# Altium PCB AIRZAI_LID_BD_REVB.PcbDoc (part 1 of 2)
Units mil, origin at the board's own origin, x right, y up, seen from the top; angles counter-clockwise.
Board outline 3392.82 x 2969.83 mil, 4 copper layers (Top, GND, PWR, Bottom), stack 30.709 mil thick; 60 components, 34 nets, 183 pads, 183 vias.
Unrouted connection lines stored in the file: 106.
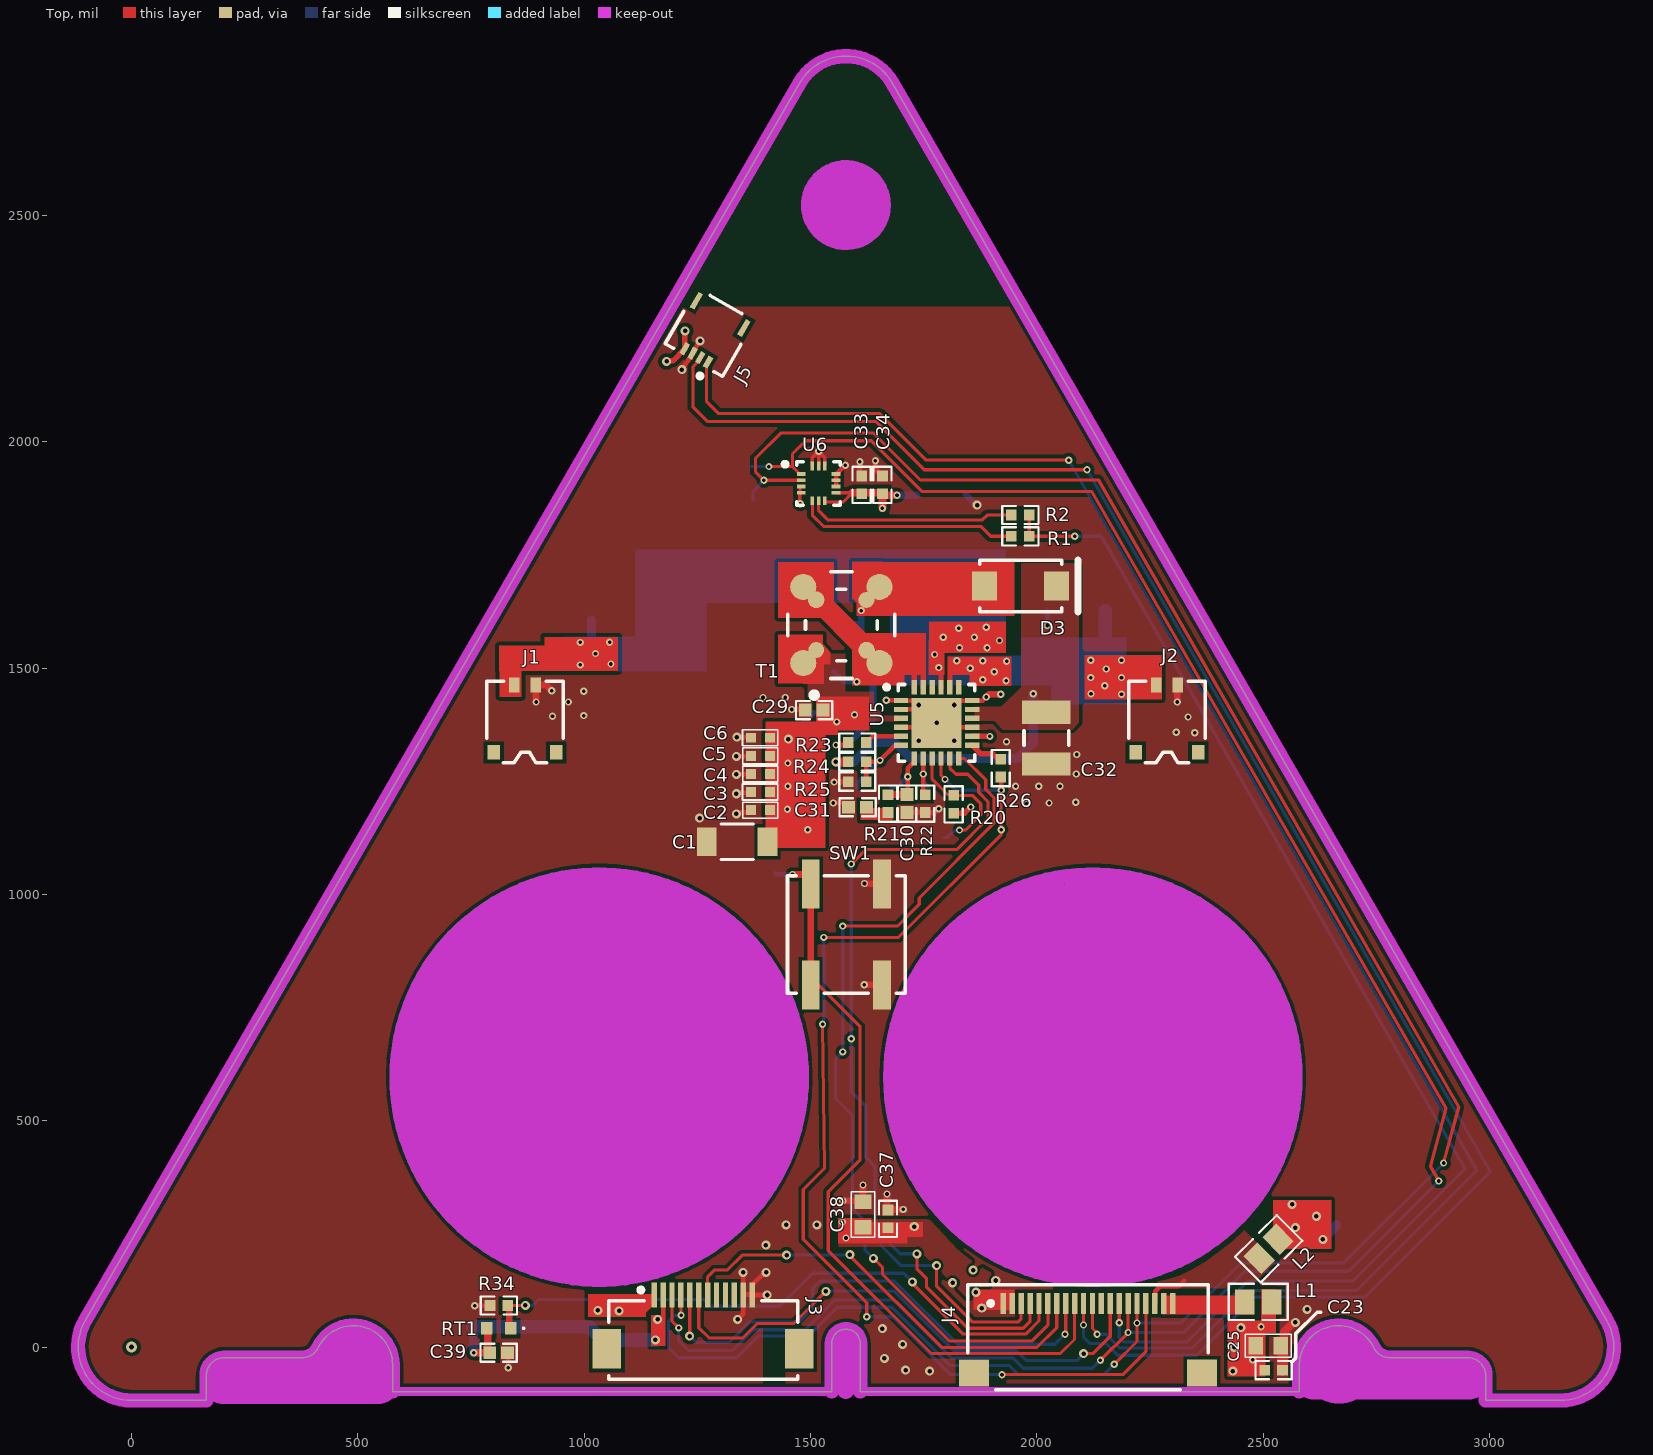
[diagram p0: Top view]
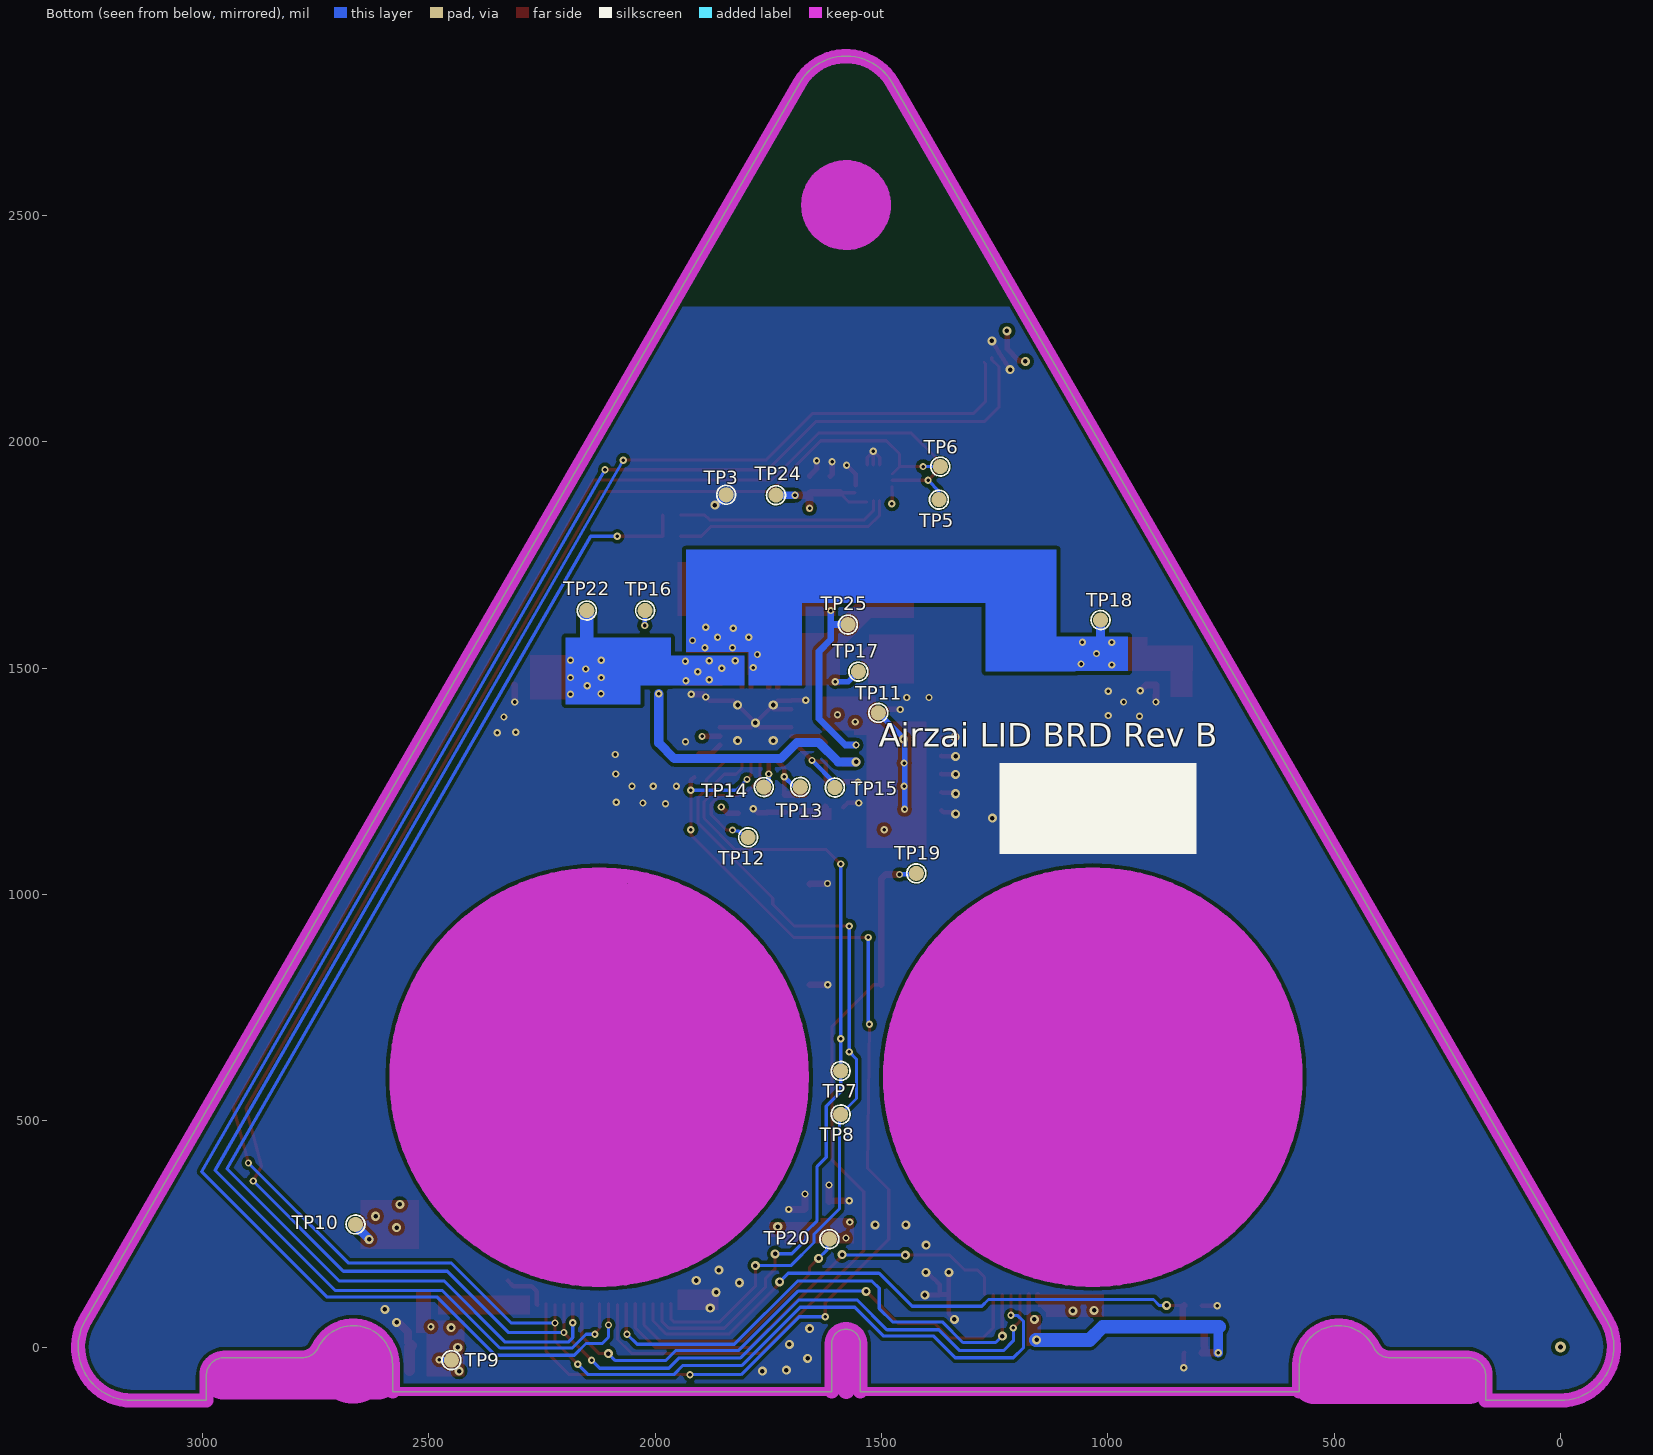
[diagram p1: Bottom view, seen from below]
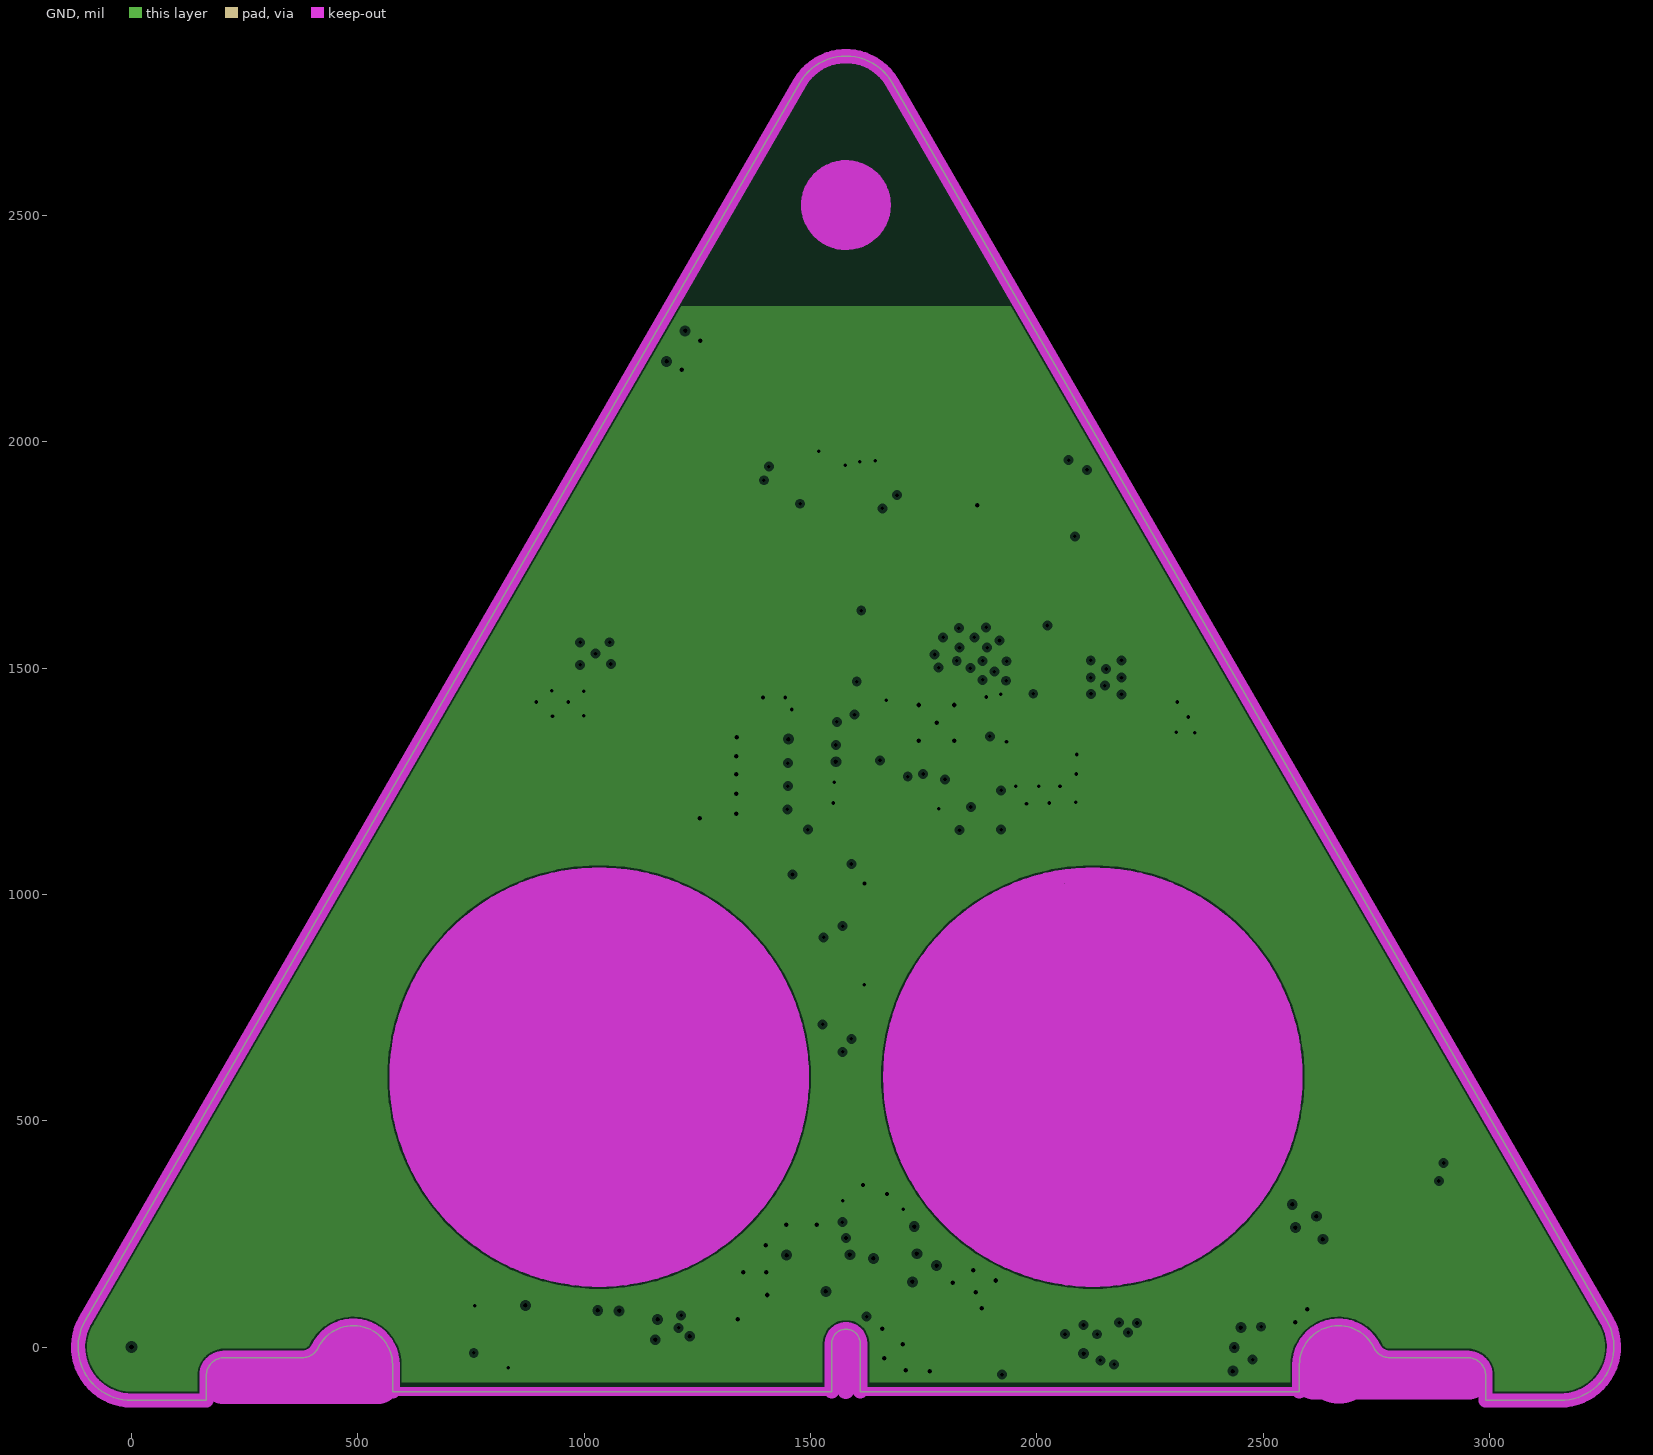
[diagram p2: GND, clearances drawn from the general rule]
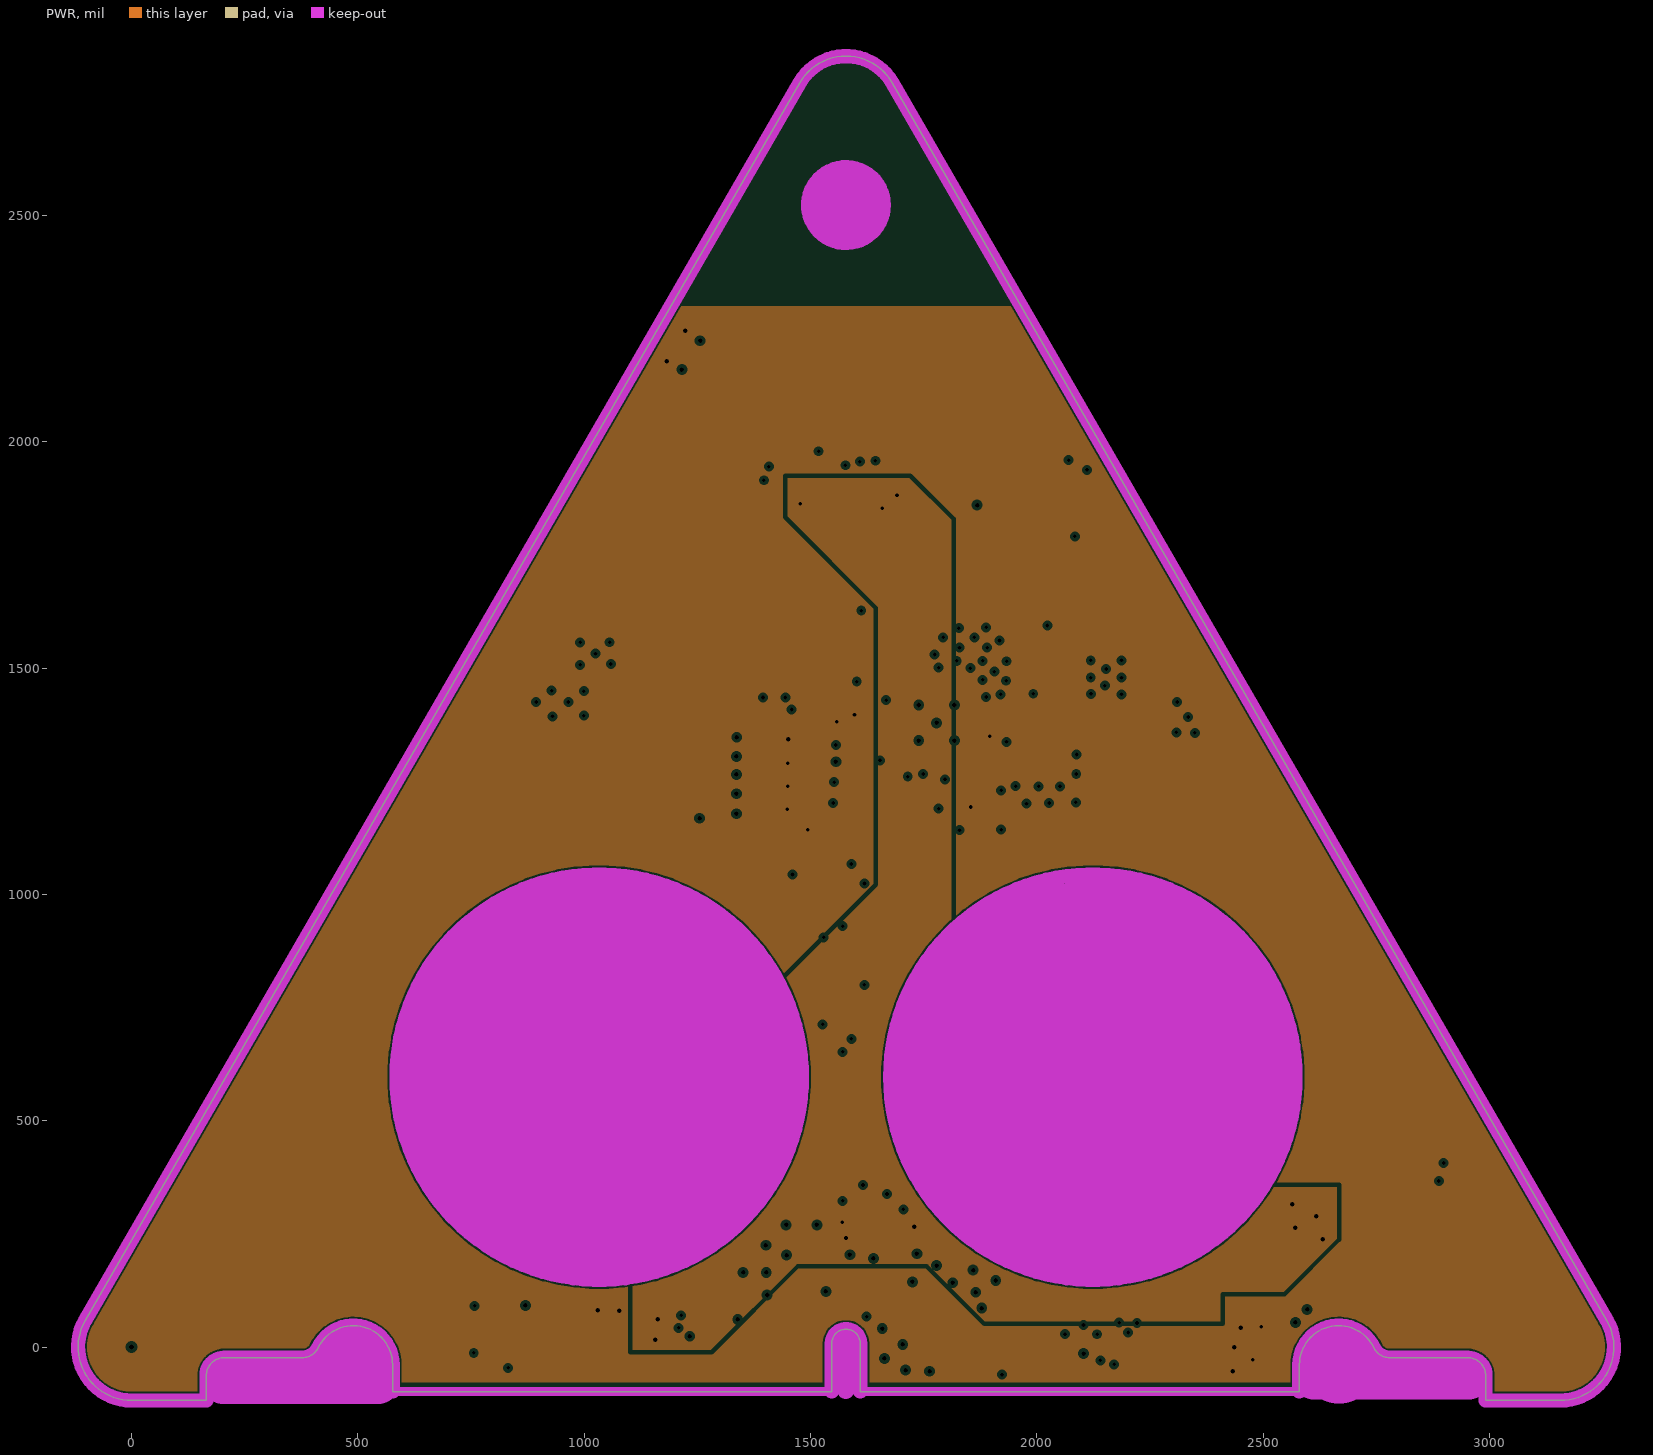
[diagram p3: PWR, clearances drawn from the general rule]
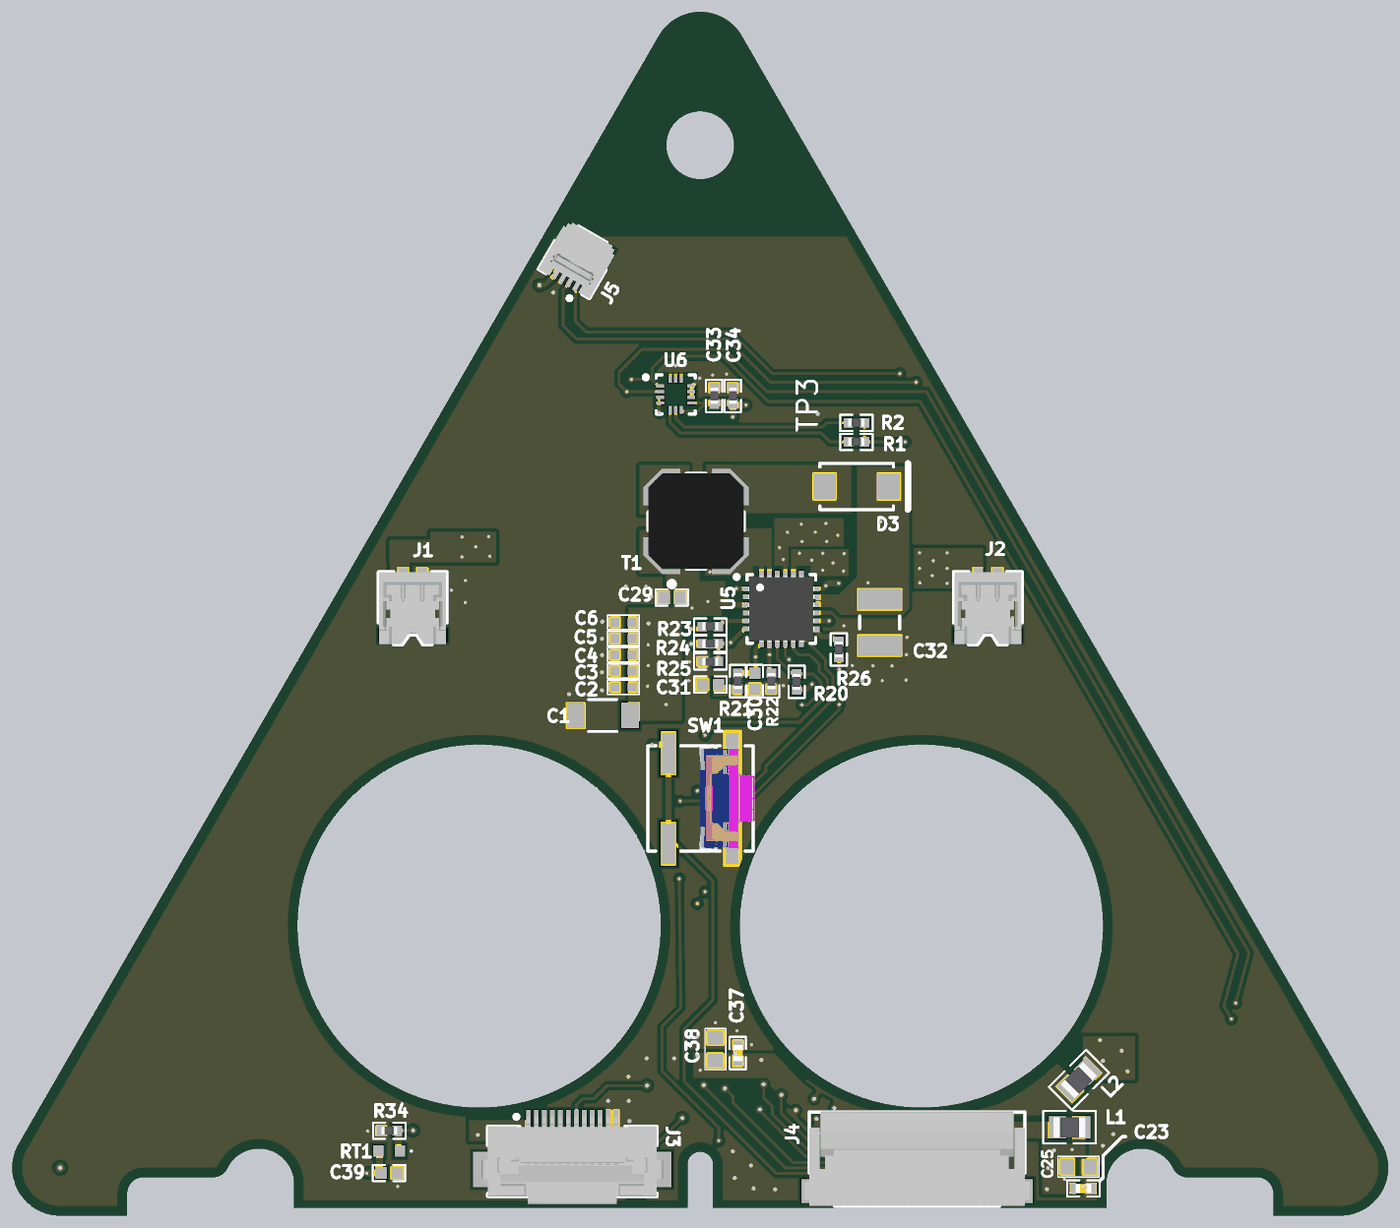
[diagram p5: 3D render of the assembled board from above, using the file's embedded part models]

## Layer stack, top to bottom
Top Solder: solder mask 0.4, Solder Resist, Dk 3.5
Top: signal copper 2.3622
Dielectric1: prepreg 5.1969, FR-4, Dk 4.8
GND: plane copper 2.3622, net GND
Dielectric 2: core 10.8661, Dk 4.2
PWR: plane copper 2.3622, net (Multiple Nets)
Dielectric3: prepreg 5.1969, FR-4, Dk 4.8
Bottom: signal copper 2.3622
Bottom Solder: solder mask 0.4, Solder Resist, Dk 3.5

## Board outline
-0.04,-118.04 165.31,-118.04 165.31,-62.92 cw(c204.68,-62.92) 204.68,-23.55 376.83,-23.55 ccw(c376.83,15.82) 412.23,-1.41 cw(c490.11,-39.3) 576.73,-39.3 576.73,-98.35 1546.8,-98.35 1546.8,7.94 cw(c1578.29,7.94) 1609.79,7.94 1609.79,-98.35 2579.86,-98.35 2579.86,-39.3 cw(c2666.47,-39.3) 2744.36,-1.41 ccw(c2779.76,15.82) 2779.76,-23.55 2951.9,-23.55 cw(c2951.9,-62.92) 2991.27,-62.92 2991.27,-118.04 3156.63,-118.04 ccw(c3156.63,0.07) 3258.91,59.13 1680.58,2792.88 ccw(c1578.29,2733.83) 1476.01,2792.88 -102.33,59.13 ccw(c-0.04,0.07)
cut-out: 1033.02,148.53 cw(c1033.02,596.36) 585.18,596.36 cw(c1033.02,596.36) 1033.02,1044.2 cw(c1033.02,596.36) 1480.85,596.36 cw(c1033.02,596.36)
cut-out: 1675.73,596.36 ccw(c2123.57,596.36) 2123.57,148.53 ccw(c2123.57,596.36) 2571.4,596.36 ccw(c2123.57,596.36) 2123.57,1044.2 ccw(c2123.57,596.36)
cut-out: 1578.29,2439.14 cw(c1578.29,2522.81) 1494.63,2522.81 cw(c1578.29,2522.81) 1578.29,2606.47 cw(c1578.29,2522.81) 1661.95,2522.81 cw(c1578.29,2522.81)

## Design rules (kind name [scope] priority, off if disabled: settings)
Clearance Clearance_gnd_polygon [(InNet('GND') AND InPolygon)] p1: gap=8 ignorepadtopadclearanceinfootprint=TRUE
Clearance [All] p2: gap=6 ignorepadtopadclearanceinfootprint=TRUE
ComponentClearance [All] p1: gap=3.94 collisioncheckmode=3 verticalgap=3.94 showdistances=FALSE
HoleSize HoleSize_1 [All] p1: absolutevalues=TRUE maxlimit=100000 minlimit=3.94 maxpercent=80.000 minpercent=20.000
HoleSize [All] p2: absolutevalues=TRUE maxlimit=100 minlimit=1 maxpercent=80.000 minpercent=20.000
HoleToHoleClearance mdViaViaSameLayer [All] p1: gap=7.87 allowstackedmicrovias=TRUE
HoleToHoleClearance [All] p2: gap=10 allowstackedmicrovias=TRUE
MinimumSolderMaskSliver [All] p1: minsoldermaskwidth=0
PasteMaskExpansion mlMinCreamFrame [All] p1: expansion=0
PasteMaskExpansion [All] p2: expansion=0
PlaneClearance [All] p1: clearance=7
PlaneConnect [All] p1: planeconnectstyle=Relief reliefexpansion=8 reliefentries=4 reliefconductorwidth=10 reliefairgap=7
PolygonConnect ThermalVias [IsVia] p1: connectstyle=Direct reliefconductorwidth=10 reliefentries=4 polygonreliefangle="90 Angle" airgapwidth=10
PolygonConnect [All] p2: connectstyle=Direct reliefconductorwidth=10 reliefentries=4 polygonreliefangle="90 Angle" airgapwidth=10
RoomDefinition "AIRZAI_LID_BD_REVB Sheet1" [InComponentClass('AIRZAI_LID_BD_REVB Sheet1')] p1: confinementstyle=ConfineIn formatcopy=TRUE lockcomponents=FALSE outline -206.69,-375 15084.93,-375 15084.93,3046.26 -206.69,3046.26
RoutingVias [All] p1: holewidth=11.81 width=23.62 viastyle="Through Hole" minholewidth=5.91 minwidth=11.81 maxholewidth=11.81 maxwidth=23.62
SilkToSilkClearance [All] p1 off: silktosilkclearance=0
SilkToSolderMaskClearance [IsPad] p1 off: minsilkscreentomaskgap=10 clearancetoexposedcopper=TRUE
SolderMaskExpansion mlMinStopFrame [All] p1: expansion=2.76
SolderMaskExpansion [All] p2: expansion=2.76
UnRoutedNet [All] p1: checkbadconnections=TRUE
Width [All] p1: maxlimit=1000 minlimit=7 preferedwidth=7
20 further rules are at their usual default settings.

## Components (designator, comment, footprint, x,y, rotation, side; value= is the part's Value field where it differs from the comment)
C1 "GRM31CR60J107ME39L" 1206_180 1338,1116 r180 top value=100uF
C2 "C1005X5R0J475M050BC" SM0402_BTD.1SM_ACT_H55_CAP_WSS 1410,1186 r180 top value=4.7uF
C3 "C1005X5R0J475M050BC" SM0402_BTD.1SM_ACT_H55_CAP_WSS 1409.99,1226 r180 top value=4.7uF
C4 "C1005X5R0J475M050BC" SM0402_BTD.1SM_ACT_H55_CAP_WSS 1410,1266 r180 top value=4.7uF
C5 "C1005X5R1A104K050BA" SM0402_BTD.1SM_ACT_H55_CAP_WSS 1410,1306 r180 top value=0.1uF
C6 "C1005X5R1A104K050BA" SM0402_BTD.1SM_ACT_H55_CAP_WSS 1409.99,1346 r180 top value=0.1uF
C23 "0.1µF" 0402CAP 2523,-51 r0 top
C25 "10µF" SM0603_BTD.1SM_H90_WSS 2483,2.66 r0 top
C29 "1uF 6.3V" CAPC0402(1005)60_M 1508,1407 r0 top value=1uF
C30 "C390pF" CAPC0402(1005)60_M 1712.74,1200.66 r270 top value=390pF
C31 "C3.9nF" CAPC0402(1005)60_M 1603.76,1192.46 r0 top value=3.9nF
C32 "2.2uF" C1210_N 2020.76,1345.46 r90 top value=2.2µF
C33 "0.1µF" 0402 1612.76,1904.46 r90 top
C34 "2.2µF" 0402 1658.76,1904.46 r270 top
C37 "0.1µF" 0402CAP 1671,283 r90 top
C38 "10µF" SM0603_BTD.1SM_H90_WSS 1615.72,264.78 r90 top
C39 "CAP 100nF 10V 0402(1005)" CAPC0402(1005)60_M 811,-12.71 r180 top value=100nF
D3 "STPS2H100A" STM-SMA-2_V 1964,1681 r0 top value="100V 2A"
J1 "=Value" CON_78171_0002 845.47,1462.6 r0 top locked
J2 "=Value" CON_78171_0002 2263.78,1462.6 r0 top
J3 "52892-1233" MOLX-52892-1233 1262.8,58.08 r0 top
J4 "XF2M-2015-1A-R100" OMRON_XF2M-2015-1A_0 2112.91,21.46 r0 top
J5 "503480-0400" MOLX-503480-0400 1274,2236 r150 top
L1 "CB2012T100KR" 0805 2489.12,100 r0 top value=10uH
L2 "CB2012T100KR" 0805 2512,217 r45 top value=10uH
R1 "DNP" 0402 1963.31,1791 r180 top
R2 "ERJ-2GE0R00X" 0402 1963.31,1838 r180 top value=0
R20 "51K1 1% 0402(1005)" 0402 1816,1199 r270 top value="51100.00 Ohm"
R21 "47K 1%" 0402 1671.25,1200.66 r270 top value="47000.00 Ohm"
R22 "12K 5%" 0402 1753.46,1200.46 r90 top value="12000.00 Ohm"
R23 "20K5" 0402 1603.1,1335.46 r180 top value="20500.00 Ohm"
R24 "560K" 0402 1603.1,1292.89 r180 top value="560000.00 Ohm"
R25 "10K" 0402 1603.1,1249.12 r0 top value="10000.00 Ohm"
R26 "0R" 0402 1920,1278.84 r270 top
R34 "10K 1% 0402(1005)" 0402 811.5,91.64 r0 top value="10000.00 Ohm"
RT1 "NCP18XH103F03RB" MURA-NCP18XH103F03RB-2_V 811,41.33 r180 top value=3455K
SW1 "SKRAALE010" SW_ALPS_SKRAALE010 1578.98,911.42 r90 top locked
T1 "NA5880-AE" COILCRAFT_NA5880-AE_MFG 1567.99,1595.11 r90 top value=3.3uH
TP3 "TESTPOINT" TP_0.9MM 1843,1882.81 r270 bottom
TP5 "TESTPOINT" TP_0.9MM 1373,1872 r270 bottom
TP6 "TESTPOINT" TP_0.9MM 1370,1945 r270 bottom
TP7 "TESTPOINT" TP_0.9MM 1590,610 r90 bottom
TP8 "TESTPOINT" TP_0.9MM 1590,514 r90 bottom
TP9 "TESTPOINT" TP_0.9MM 2450,-29 r90 bottom
TP10 "TESTPOINT" TP_0.9MM 2662,270.91 r90 bottom
TP11 "TESTPOINT" TP_0.9MM 1507,1401 r90 bottom
TP12 "TESTPOINT" TP_0.9MM 1794.51,1126 r90 bottom
TP13 "TESTPOINT" TP_0.9MM 1679.37,1237.31 r90 bottom
TP14 "TESTPOINT" TP_0.9MM 1760,1237 r90 bottom
TP15 "TESTPOINT" TP_0.9MM 1603,1236 r90 bottom
TP16 "TESTPOINT" TP_0.9MM 2022,1627 r90 bottom
TP17 "TESTPOINT" TP_0.9MM 1551,1492 r90 bottom
TP18 "TESTPOINT" TP_0.9MM 1016,1606 r90 bottom
TP19 "TESTPOINT" TP_0.9MM 1423,1046.46 r90 bottom
TP20 "TESTPOINT" TP_0.9MM 1615.14,238.42 r90 bottom
TP22 "TESTPOINT" TP_0.9MM 2151,1627 r90 bottom
TP24 "TESTPOINT" TP_0.9MM 1733,1882 r90 bottom
TP25 "TESTPOINT" TP_0.9MM 1574,1596 r90 bottom
U5 "FAN8841MPXCT-ND" WFQFN-24-FAN8841MPX 1778.34,1379.02 r0 top value=FAN8841MPX
U6 "LIS2DHTR" STM-LGA-14_L 1517.76,1908.01 r0 top

## Footprints (in the part's own frame and the unit in brackets; to place one, negate y for a bottom-side part, rotate by r counter-clockwise, add the part's x,y. Pads: shape width x height; smd on the part's side, far side on the other; paste and mask are expansions set on the pad)
0402 [mm] "Chip Resistor, Body 1.1x0.5mm, IPC High Density"
  rect 0.6x0.6 smd: 1(-0.5,0) 2(0.5,0)
  silkscreen extent -1.02,-0.51 1.02,0.51, body extent -0.5,-0.25 0.5,0.25, height 0.27
0402CAP [mm] "Chip Capacitor, Body 1.1x0.5mm, IPC High Density"
  rect 0.6x0.6 smd: 1(-0.5,0) 2(0.5,0)
  silkscreen extent -1.02,-0.51 1.02,0.51, body extent -0.5,-0.3 0.5,0.3, height 0.19
0805 [mm] "Chip Resistor, Body 2.0x1.3mm, IPC High Density"
  rect 1.1x1.4 smd: 1(-0.75,0) 2(0.75,0)
  silkscreen extent -1.65,-1.02 1.65,1.02, body extent -1.02,-0.64 0.98,0.62, height 0.47
1206_180 [mm]
  rect 1.1x1.6 smd: 1(-1.7,0) 2(1.7,0)
  silkscreen extent -0.9,-1 0.9,1, body extent -1.75,-0.95 1.75,0.95, height 1.8
C1210_N [mm] "Chip Capacitor, Body 3.2x2.5mm, IPC Medium Density"
  rect 1.3x2.7 smd: 1(-1.45,0) 2(1.45,0)
  silkscreen extent -0.4,-1.25 0.4,1.25, body extent -1.7,-1.35 1.7,1.35, height 1.5
CAPC0402(1005)60_M [mm] "Chip Capacitor, Body 1.0x0.5mm, Height 0.6mm, IPC Low Density"
  rect 0.72x0.72 smd: 1(-0.5,0) 2(0.5,0)
  silkscreen extent -1.02,-0.51 1.02,0.51, body extent -0.55,-0.3 0.55,0.3, height 0.6
COILCRAFT_NA5880-AE_MFG [mil]
  round 57.62 smd paste-39370.1 mask-39370.1: 1(-84.16,84.15) 2(-84.16,-84.16) 3(84.15,-84.16) 4(84.15,84.15)
  round 35 smd paste+0 mask+0: 1(-55.11,55.38) 3(55.11,-55.38)
  round 36.8 smd paste+0 mask+0: 2(-55.68,-55.65) 4(55.68,55.65)
  Top region: -39.37,129.92 -83.66,129.92 -129.92,83.66 -129.92,39.37 -82.68,39.37 -39.37,82.67
  Top region: 39.37,129.92 83.66,129.92 129.92,83.66 129.92,39.37 82.67,39.37 39.37,82.67
  Top region: -39.37,-129.92 -83.66,-129.92 -129.92,-83.66 -129.92,-39.37 -82.68,-39.37 -39.37,-82.68
  Top region: 39.37,-129.92 83.66,-129.92 129.92,-83.66 129.92,-39.37 82.67,-39.37 39.37,-82.68
  Top region: 24.61,86.61 51.38,86.61 86.61,55.91 86.61,24.61 59.84,24.61 24.61,55.91 24.61,86.61
  Top region: 86.61,-24.61 86.61,-51.38 51.38,-86.61 24.61,-86.61 24.61,-55.91 59.84,-24.61 86.61,-24.61
  Top region: -24.61,-86.61 -51.38,-86.61 -86.61,-55.91 -86.61,-24.61 -59.84,-24.61 -24.61,-55.91 -24.61,-86.61
  Top region: -86.61,24.61 -86.61,51.38 -51.38,86.61 -24.61,86.61 -24.61,55.91 -59.84,24.61 -86.61,24.61
  silkscreen extent -160,-118 118,118, body extent -134,-134 134,134, height 10
CON_78171_0002 [mm] "1.55 MATED HT"
  rect 0.7x0.8 smd mask+0.1: 0(-1.15,-3.775) 0(2.35,-3.775)
  rect 0.6x0.85 smd mask+0.1: 1(0,0) 2(1.2,0)
  silkscreen extent -1.55,-4.37 2.75,0.2, body extent -1.5,-4.33 2.7,0.2, height 1.44
MOLX-52892-1233 [mm] "FPC Connector, 12-Leads, Right Angle, Pitch 0.5 mm, Mated Height 2.0 mm, SMT"
  rect 0.3x1.4 smd: 1(-2.75,1.448) 2(-2.25,1.448) 3(-1.75,1.448) 4(-1.25,1.448) 5(-0.75,1.448) 6(-0.25,1.448) 7(0.25,1.448) 8(0.75,1.448) 9(1.25,1.448) 10(1.75,1.448) 11(2.25,1.448) 12(2.75,1.448)
  rect 1.6x2.2 smd: MP1(-5.4,-1.575) MP2(5.4,-1.575)
  silkscreen extent -5.3,-3.28 5.3,1.85, body extent -5.7,-3.77 5.7,1.73, height 2.05
MOLX-503480-0400 [mm] "FPC Connector, 4-Leads, Right Angle, Pitch 0.5 mm, Mated Height 1.0 mm, SMT"
  rect 0.3x0.7 smd: 1(-0.75,1.325) 2(-0.25,1.325) 3(0.25,1.325) 4(0.75,1.325)
  rect 0.3x1 smd: MP1(-1.54,-1.325) MP2(1.54,-1.325)
  silkscreen extent -1.85,-1.98 1.85,2.35, body extent -1.85,-1.97 1.85,1.63, height 1.91
MURA-NCP18XH103F03RB-2_V [mm] "Chip, 2-Leads, Body 1.6x0.8mm"
  rect 0.65x0.7 smd: 1(-0.675,0) 2(0.675,0)
  silkscreen extent -1.45,-0.05 -1.35,0.05, body extent -0.8,-0.4 0.8,0.4, height 0.8
OMRON_XF2M-2015-1A_0 [mm]
  rect 0.3x1.2 smd paste+0: 1(-4.75,1.9) 2(-4.25,1.9) 3(-3.75,1.9) 4(-3.25,1.9) 5(-2.75,1.9) 6(-2.25,1.9) 7(-1.75,1.9) 8(-1.25,1.9) 9(-0.75,1.9) 10(-0.25,1.9) 11(0.25,1.9) 12(0.75,1.9) 13(1.25,1.9) 14(1.75,1.9) 15(2.25,1.9) 16(2.75,1.9) 17(3.25,1.9) 18(3.75,1.9) 19(4.25,1.9) 20(4.75,1.9)
  rect 1.7x1.5 smd paste+0: MP1(-6.4,-2) MP2(6.4,-2)
  silkscreen extent -6.75,-2.95 6.75,2.95, body extent -7.05,-2.92 7.05,2.98, height 2
SM0402_BTD.1SM_ACT_H55_CAP_WSS [mil]
  rect 22x22 smd mask+4: 1(0,0) 2(42,0)
  silkscreen extent -18,-18 60,18, body extent -1,-10 44,10, height 26
SM0603_BTD.1SM_H90_WSS [mil]
  rect 32x38 smd mask+4: 1(0,0) 2(56,0)
  silkscreen extent -23,-26 79,26, body extent -4,-17 59,17, height 35
STM-LGA-14_L [mm] "LGA, 14-Leads, Body 2.15x2.15mm, Pitch 0.35mm, IPC High Density"
  rect 0.5x0.2 smd mask+0.07: 1(-0.974,0.525) 2(-0.974,0.175) 3(-0.974,-0.175) 4(-0.974,-0.525) 8(0.974,-0.525) 9(0.974,-0.175) 10(0.974,0.175) 11(0.974,0.525)
  rect 0.2x0.5 smd mask+0.07: 5(-0.35,-0.974) 6(0,-0.974) 7(0.35,-0.974) 12(0.35,0.974) 13(0,0.974) 14(-0.35,0.974)
  silkscreen extent -2,-1.22 1.22,1.23, body extent -1.08,-1.07 1.07,1.08, height 1
STM-SMA-2_V [mm] "Diode, 2-Leads, Body 4.6x2.9mm"
  rect 1.4x1.64 smd: 1(-2.015,0) 2(2.015,0)
  silkscreen extent -2.3,-1.45 3.21,1.45, body extent -2.3,-1.45 2.3,1.45, height 2.71
SW_ALPS_SKRAALE010 [mm] "6.2MM SQ 2.9RD ACT"
  rect 2.75x1 smd paste-0.1 mask+0.102: 1(-2.825,2) 1(2.825,2) 2(-2.825,-2) 2(2.825,-2)
  silkscreen extent -3.3,-3.3 3.3,3.3, body extent -3.4,-3.21 3.4,3.22, height 3.48
TP_0.9MM [mm] "0.9MM DIA TESTPOINT"
  round 0.85 smd paste-5 mask+0.05: 1(0,0)
  silkscreen extent -0.53,-0.53 0.53,0.53
WFQFN-24-FAN8841MPX [mm]
  rect 0.8x0.3 smd mask+0.07: 1(-2,1.25) 2(-2,0.75) 3(-2,0.25) 4(-2,-0.25) 5(-2,-0.75) 6(-2,-1.25) 13(2,-1.25) 14(2,-0.75) 15(2,-0.25) 16(2,0.25) 17(2,0.75) 18(2,1.25)
  rect 0.3x0.8 smd mask+0.07: 7(-1.25,-2) 8(-0.75,-2) 9(-0.25,-2) 10(0.25,-2) 11(0.75,-2) 12(1.25,-2) 19(1.25,2) 20(0.75,2) 21(0.25,2) 22(-0.25,2) 23(-0.75,2) 24(-1.25,2)
  rect 2.8x2.8 smd: 25(0,0)
  silkscreen extent -2.92,-2.15 2.15,2.15, body extent -2.05,-2.05 2.05,2.05, height 0.8

## Part data
C1: "CAP, CERM, 100 µF, 6.3 V, +/- 20%, X5R, 1206", Cap_Case=1206, Manufacturer=MuRata, Supplier Part Number 1=490-4539-1-ND, TempCo=X5R, Tolerance_%=20, Value1="0.003 ohm", Value2=6.3V, ValueDisplayed=100µF, AEC Category=Q200, AEC Qualified=?, Cap_F=0.0001, ComponentLink1Description="Datasheet link", ComponentLink1URL=http://search.murata.co.jp/Ceramy/PnsearchViewAction.do?HnOFG=ON&HnNFG=ON&SEL_CNT=50&sLang=en&sKey=GRM31CR60J107ME39L&x=9&y=9&search=startwith, CompType=Capacitor, ESR_ohm=0.003, LatestRevisionDate=2016-07-02, MountType=SMT, PackageReference=1206, PartNumber=GRM31CR60J107ME39L, Polarized=N, Published=2008-06-19, Publisher="Texas Instruments", RoHS=Y, SizeArea_mm2=5.12, SizeAreaWB_mm2=10.92, SizeX_mm=3.2, SizeY_mm=1.6, SizeZ_mm=1.8, Supplier 1=Digi-Key, Supplier 2=Mouser, Supplier 3=Farnell, Supplier Part Number 2=81-GRM31CR60J107ME9L, Supplier Part Number 3=1735535, SymbolVersion=2008-07-09, TaMax_C=85, TaMin_C=-55, Technology=Ceramic, U/M=EA, VDC_V=6.3
C2: "CAP, CERM, 4.7 µF, 6.3 V, +/- 20%, X5R, 0402", Manufacturer=TDK, PartNumber=C1005X5R0J475M050BC
C3 C4: "CAP, CERM, 4.7 µF, 6.3 V, +/- 20%, X5R, 0402", Cap_Case=0402, Manufacturer=TDK, Supplier Part Number 1=445-7395-1-ND, TempCo=X5R, Tolerance_%=20, Value1=Unknown, Value2=6.3V, ValueDisplayed=4.7µF, Cap_F=0.0000047, ComponentLink1Description="Datasheet link", ComponentLink1URL=http://www.tdk.com/pdf/TDKMLCCCapRange.pdf, CompType=Capacitor, LatestRevisionDate=2015-02-23, MountType=SMT, PackageReference=0402, PartNumber=C1005X5R0J475M050BC, Polarized=N, Published=2008-06-19, Publisher="Texas Instruments", RoHS=Y, Supplier 1=Digi-Key, Supplier 2=Farnell, Supplier 3=Newark, Supplier Part Number 2=1962109, Supplier Part Number 3=48T2906, SymbolVersion=2008-07-09, TaMax_C=85, TaMin_C=-55, Technology=Ceramic, U/M=EA, VDC_V=6.3
C5: "CAP, CERM, 0.1 µF, 10 V, +/- 10%, X5R, 0402", Cap_Case=0402, Manufacturer=TDK, Supplier Part Number 1=445-1265-1-ND, TempCo=X5R, Tolerance_%=10, Value1=Unknown, Value2=10V, ValueDisplayed=0.1µF, Cap_F=0.0000001, ComponentLink1Description="Datasheet link", ComponentLink1URL=http://product.tdk.com/en/catalog/datasheets/mlcc_commercial_general_en.pdf, CompType=Capacitor, LatestRevisionDate=2015-02-23, MountType=SMT, PackageReference=0402, PartNumber=C1005X5R1A104K050BA, Polarized=N, Published=2008-06-19, Publisher="Texas Instruments", RoHS=Y, Supplier 1=Digi-Key, Supplier 2=Mouser, Supplier 3=Farnell, Supplier Part Number 2=810-C1005X5R1A104K, Supplier Part Number 3=2368215, SymbolVersion=2008-07-09, TaMax_C=85, TaMin_C=-55, Technology=Ceramic, U/M=EA, VDC_V=10
C6: "CAP, CERM, 0.1 µF, 10 V, +/- 10%, X5R, 0402", Cap_Case=SM0402_BTD.1SM_ACT, Manufacturer=TDK, Supplier Part Number 1=445-1265-1-ND, TempCo=X5R, Tolerance_%=10, Value1=Unknown, Value2=10V, ValueDisplayed=0.1µF, Cap_F=0.0000001, ComponentLink1Description="Datasheet link", ComponentLink1URL=http://product.tdk.com/en/catalog/datasheets/mlcc_commercial_general_en.pdf, CompType=Capacitor, LatestRevisionDate=2015-02-23, MountType=SMT, PackageReference=0402, PartNumber=C1005X5R1A104K050BA, Polarized=N, Published=2008-06-19, Publisher="Texas Instruments", RoHS=Y, Supplier 1=Digi-Key, Supplier 2=Mouser, Supplier 3=Farnell, Supplier Part Number 2=810-C1005X5R1A104K, Supplier Part Number 3=2368215, SymbolVersion=2008-07-09, TaMax_C=85, TaMin_C=-55, Technology=Ceramic, U/M=EA, VDC_V=10
C23 C33 C37: library part C0402-100n, "Capacitor, X7R, ±10%", Case-EIA=0402, Case-Metric=1005, Manufacturer=TDK, Manufacturer Part Number=C1005X7R1C104K, Rated Voltage="16 V", Supplier Part Number 1=445-4952-2-ND, Tolerance=±10%, Note="16V ±10% X7R", Pin Count=2, Supplier 1=Digi-Key, Technology=SMT
  C23: Max Thickness=0.6mm
  C33 C37: Max Thickness="0.6 mm"
C25: library part C0402-100n, "6.3volts X5R 20%", Case-EIA=0603, Case-Metric=1608, Manufacturer=MURATA, Manufacturer Part Number=GRM188R60J106ME47D, Rated Voltage="6.3 V", Supplier Part Number 1=490-3896-6-ND, Tolerance=±10%, Max Thickness="0.9 mm", Note="6.3volts X5R 20%", Supplier 1=Digi-Key, Technology=SMT
C29: library part CAP, "CAP 1uF 6.3V ±10% 0402 (1005 Metric) Thickness 0.6mm SMD", Case-EIA=0402, Case-Metric=1005, Manufacturer=MURATA, Manufacturer Part Number=GRM155R61A105KE15D, Rated Voltage="10 V", Supplier Part Number 1=490-3890-6-ND, Tolerance=±10%, Max Thickness="0.6 mm", Supplier 1=Digi-Key, Technology=SMT
C30: library part CAP, "CAP 390pF 50V ±20% 0402 (1005 Metric) Thickness 0.6mm SMD", Case-EIA=0402, Case-Metric=1005, Manufacturer=KEMET, Manufacturer Part Number=C0402C391K5RACTU, Rated Voltage="50 V", Supplier Part Number 1=399-7792-6-ND, Tolerance=±20%, Max Thickness="0.6 mm", Supplier 1=Digi-Key, Technology=SMT
C31: library part CAP, "CAP 3.9nF 50V ±10% 0402 (1005 Metric) Thickness 0.6mm SMD", Case-EIA=0402, Case-Metric=1005, Manufacturer=TDK, Manufacturer Part Number=C2012C0G1H392J060AA, Rated Voltage="50 V", Supplier Part Number 1=445-7510-1-ND, Tolerance=±10%, Max Thickness="0.6 mm", Supplier 1=Digi-Key, Technology=SMT
C32: library part C3225JB2A225K230, "Imported", Case-EIA=1210, Case-Metric=3225, Manufacturer=TDK, Manufacturer_Part_Number=C3225JB2A225K230AB, Rated Voltage="100 V", Supplier Part Number 1=445-11868-2-ND, Tolerance=±10%, Built_By=EMA_UL_Team, C="Copyright (C) 2015 Accelerated Designs. All rights reserved", Manufacturer Part Number=C3225JB2A225K230AB, RefDes=RefDes, Supplier 1=Digi-Key, Technology=SMT, Type=DEV, Vendor=TDK
C34: library part "C0603-1µ0 X7R", "Capacitor, X7R, ±10%", Case-EIA=0402, Case-Metric=1005, Manufacturer=TDK, Manufacturer Part Number=C1005X5R0J225M, Rated Voltage="6.3 V", Supplier Part Number 1=445-4999-2-ND, Tolerance=±10%, Max Thickness="0.6 mm", Note="6.3V ±20% X5R", Supplier 1=Digi-Key, Technology=SMT
C38: library part C0402-100n, "Capacitor, X7R, ±10%", Case-EIA=0603, Case-Metric=1608, Manufacturer=MURATA, Manufacturer Part Number=GRM188R60J106ME47D, Rated Voltage="6.3 V", Supplier Part Number 1=490-3896-6-ND, Tolerance=±10%, Max Thickness="0.9 mm", Note="6.3volts X5R 20%", Supplier 1=Digi-Key, Technology=SMT
C39: library part CAP, "CAP 100nF 10V ±10% 0402 (1005 Metric) Thickness 0.6mm SMD", Case-EIA=0402, Case-Metric=1005, Manufacturer=Yageo, Manufacturer Part Number=CC0402ZRY5V8BB104, Rated Voltage="25 V", Supplier Part Number 1=311-1375-6-ND, Tolerance=±10%, Max Thickness="0.6 mm", Supplier 1=Digi-Key, Technology=SMT
D3: library part DSKY-AK-2, "Power Schottky Rectifier, 2 A, 100 V, 2-Pin SMD (SMA), RoHS, Tape and Reel", Capacitance @ Vr, F=-, Case-EIA="DO-214AC, SMA", Current - Average Rectified (Io)=2A, Current - Reverse Leakage @ Vr=1µA@100V, Manufacturer=STMicroelectronics, Operating Temperature - Junction=175°C(Max), Package / Case=DO-214AC,SMA, Package Description="2-Pin Surface Mount Device, Body 4.275 x 2.575 mm", Package Reference=SMA, Rated Voltage="100 V", Standard Package=1, Supplier Device Package=SMA(DO-214AC), Supplier Part Number 1=497-3758-6-ND, Voltage - DC Reverse (Vr) (Max)=100V, Voltage - Forward (Vf) (Max) @ If=790mV@2A, Category=DiscreteSemiconductorProducts, Datasheet URL=http://www.st.com/content/ccc/resource/technical/document/datasheet/0a/8b/df/ef/15/72/4f/38/CD00001548.pdf/files/CD00001548.pdf/jcr:content/translations/en.CD00001548.pdf, Datasheet Version=06/2013, Diode Type=Schottky, Family=Diodes,Rectifiers-Single, Manufacturer Part Number=STPS2H100A, Manufacturer URL=http://www.st.com/, Mounting Technology=SurfaceMount, Mounting Type=SurfaceMount, Online Catalog=SchottkyDiode, Other Names=497-3758-6, Other Related Documents=STPS2H100ViewAllSpecifications, Package URL=http://www.st.com/st-web-ui/static/active/en/resource/technical/document/datasheet/CD00283518.pdf, Packaging=Digi-Reel®, Reverse Recovery Time (trr)=-, Series=-, Speed=FastRecovery=200mA(Io), Supplier 1=Digi-Key, Technology=SMT
J1 J2: library part CONN_BM02B_SURS_TF, Manufacturer=MOLEX, Manufacturer Part Number=781710002, Supplier Part Number 1=WM4459TR-ND, Supplier 1=Digi-Key, Technology=SMT
J3: library part MOLX-52892-1233, "0.5 mm Pitch Easy-On(TM) Type FPC Connector, 2.0 mm Mated Height, Right Angle, ZIF, SMT, Bottom Contact, 12 Circuits, -40 to 85 degC, ELV and RoHS Compliant, Tape and Reel", Current (Max per Contact)=0.5A, Manufacturer=MOLEX, Manufacturer Part Number=0528921233, Supplier Part Number 1=WM11084TR-ND, Voltage (Max)=50V, Circuits (Loaded)=12, ComponentLink1Description="Manufacturer URL", ComponentLink1URL=http://www.molex.com/molex/index.jsp, ComponentLink2Description=Datasheet, ComponentLink2URL=http://www.molex.com/webdocs/datasheets/pdf/en-us/0528921233_FFC_FPC_CONNECTORS.pdf, ComponentLink3Description="Package Specification", ComponentLink3URL=http://www.molex.com/pdm_docs/sd/528921233_sd.pdf, Contact Position=Bottom, Durability (mating cycles max)=20, Entry Angle="90degrees Angle", Mated Height=2.00mm, Material - Metal="Phosphor Bronze", Material - Plating Mating="Silver, Tin-Bismuth", Material - Plating Termination="Silver, Tin-Bismuth", Max Thickness="0.6 mm", Mounting Technology="Surface Mount", Number of Rows=1, Orientation="Right Angle", PackageDescription="12-Lead FPC Connector, Pitch 0.5 mm", PackageReference=52892-1233, PackageVersion="Rev. A, 05/2013", Packing="Tape and Reel", PartNumber=52892-1233, PCB Locator=No, PCB Retention=Yes, Pitch - Mating Interface=0.50mm, Pitch - Termination Interface=0.50mm, Polarized to PCB=No, RoHS=TRUE, Stackable=No, Supplier 1=Digi-Key, Technology=SMT
J4: Manufacturer="OMRON ELECTRONIC COMPONENTS", Supplier Part Number 1=Z5253-ND, ComponentLink1Description="Manufacturer URL", ComponentLink1URL=http://www.molex.com/molex/index.jsp, ComponentLink2URL=http://www.molex.com/webdocs/datasheets/pdf/en-us/0528922033_FFC_FPC_CONNECTORS.pdf, ComponentLink3Description="Package Specification", ComponentLink3URL=http://www.molex.com/pdm_docs/sd/528922033_sd.pdf, Manufacturer Part Number=XF2M-2015-1A-R100, Stock 1=0, Supplier 1=Digikey
J5: "0.5 mm Pitch Easy-On(TM) BackFlip(TM) Type FPC Connector, 1.0 mm Mated Height, Right Angle, SMT, Dual Contact, 4 Circuits, -40 to 85 degC, ELV and RoHS Compliant, Tape and Reel", Current (Max per Contact)=0.5A, Manufacturer=Molex, Voltage (Max)="50V AC (RMS)/DC", Circuits (Loaded)=4, ComponentLink1Description="Manufacturer URL", ComponentLink1URL=http://www.molex.com/molex/index.jsp, ComponentLink2Description=Datasheet, ComponentLink2URL=http://www.molex.com/webdocs/datasheets/pdf/en-us/5034800400_FFC_FPC_CONNECTORS.pdf, ComponentLink3Description="Package Specification", ComponentLink3URL=http://www.molex.com/pdm_docs/sd/5034800400_sd.pdf, Contact Position=Dual, Durability (mating cycles max)=10, Entry Angle="90degrees Angle", Mated Height=1.00mm, Material - Metal="Phosphor Bronze", Material - Plating Mating=Gold, Material - Plating Termination="Gold, Tin", Mounting Technology="Surface Mount", Number of Rows=1, Orientation="Right Angle", PackageDescription="4-Lead FPC Connector, Pitch 0.5 mm", PackageReference=503480-0400, PackageVersion="Rev. F, 09/2012", Packing="Tape and Reel", PartNumber=503480-0400, PCB Locator=No, PCB Retention=Yes, Pitch - Mating Interface=0.50mm, Polarized to PCB=Yes, RoHS=TRUE, Stackable=No
L1 L2: "Inductor, 10 µH, 0.5A, 0.65 ohm, SMD", Case/Package=0805, Case Code (Metric)=2012, Current Rating=520mA, DC Resistance (DCR)=500mR, Inductance=10uH, Inductance Tolerance=10%, Manufacturer="Taiyo Yuden", Max DC Current=200mA, Max Operating Temperature=105°C, Min Operating Temperature=-40°C, Package Quantity=3000, Self Resonant Frequency=32MHz, Supplier Part Number 1=587-2452-1-ND, Test Frequency=2.52MHz, Value1="0.65 ohm", Value2=0.5A, ValueDisplayed=10µH, Case Code (Imperial)=0805, ComponentLink1Description="Datasheet link", ComponentLink1URL=http://www.yuden.co.jp/ut/product/category/inductor/BRC2012T2R2MD.pdf, ComponentLink2Description=https://datasheet.ciiva.com/1040/cb2012t100kr-ss-1040384.pdf?src-supplier=Digi-Key, ComponentLink2URL=https://datasheet.ciiva.com/1040/cb2012t100kr-ss-1040384.pdf?src-supplier=Digi-Key, Composition=Wirewound, Core Material=Ferrite, Halogen Free="Halogen Free", Height=1.25mm, Height - Seated (Max)=0.057inch, Lead Free="Lead Free", Length=0.079inch, Manufacturer Part Number=CB2012T100KR, Mount="Surface Mount", Number of Pins=2, Packaging="Tape and Reel", PartNumber=CB2012T100KR, Pricing 1="1 = 0.23000, 10 = 0.20700, 100 = 0.14230, 500 = 0.12162, 1000 = 0.09315 (USD)", REACH SVHC=Unknown, RoHS=Yes, Saturation Current=200mA, Shielding=Unshielded, Stock 1=18059, Supplier 1=Digi-Key, Technology=Wirewound, Termination=SMD/SMT, Tolerance=10%, Width=0.049inch
R1: library part ERJ-2GE0R00X, "RES, DNP, 0402", ComponentLink1Description="Datasheet link", ComponentLink1URL=http://www.panasonic.com/industrial/components/pdf/AOA0000CE1.pdf
R2: "RES, 0, 5%, 0.063 W, 0402", Manufacturer=Panasonic, Power_W=0.063, Supplier Part Number 1=P0.0JCT-ND, TempCo="600 ppm/C", Tolerance_%=5, Value1=5%, Value2=0.063W, Value_Code=0000, ValueDisplayed=0, AEC Category=Q200, AEC Qualified=?, ComponentLink1Description="Datasheet link", ComponentLink1URL=http://www.panasonic.com/industrial/components/pdf/AOA0000CE1.pdf, CompType=Resistor, EIA_Code=E24, LatestRevisionDate=2016-07-01, MountType=SMT, PackageReference=0402, PartNumber=ERJ-2GE0R00X, Published=2008-06-26, Publisher="Texas Instruments", Res_ohm=0, RoHS=Y, SizeArea_mm2=0.5, SizeX_mm=1, SizeY_mm=0.5, SizeZ_mm=0.6, Supplier 1=Digi-Key, Supplier 2=Mouser, Supplier 3=Farnell, Supplier Part Number 2=667-ERJ-2GE0R00X, Supplier Part Number 3=2059190, SymbolVersion=2009-05-29, Technology="Thick Film", U/M=EA, VDC_V=50
R20: library part RES, "51K1 0.063W 1% 0402 (1005 Metric)  SMD", Case-EIA=0402, Case-Metric=1005, Manufacturer="Vishay Dale", Manufacturer Part Number=CRCW040251K1FKED, Power="0.063 W", Supplier Part Number 1=541-51.1KLDKR-ND, Tolerance="1 %", Max Thickness="0.6 mm", Supplier 1=Digi-Key, Technology=SMT
R21: library part RES, "47K 0.063W 1% 0402 (1005 Metric)  SMD", Case-EIA=0402, Case-Metric=1005, Manufacturer=panasonic, Manufacturer Part Number=ERJ-2RKF4702X, Power="0.063 W", Supplier Part Number 1=P47.0KLTR-ND, Tolerance="1 %", Max Thickness="0.6 mm", Supplier 1=Digi-Key, Technology=SMT
R22: library part RES, "12K 0.063W 5% 0402 (1005 Metric)  SMD", Case-EIA=0402, Case-Metric=1005, Manufacturer=Yageo, Manufacturer Part Number=RC0402JR-0712KL, Power="0.063 W", Supplier Part Number 1=311-12KJRTR-ND, Tolerance="5 %", Max Thickness="0.6 mm", Supplier 1=Digi-Key, Technology=SMT
R23: library part RES, "20K5 0.063W 1% 0402 (1005 Metric)  SMD", Case-EIA=0402, Case-Metric=1005, Manufacturer="Vishay Dale", Manufacturer Part Number=CRCW040220K5FKED, Power="0.063 W", Supplier Part Number 1=541-20.5KLDKR-ND, Tolerance="1 %", Max Thickness="0.6 mm", Supplier 1=Digi-Key, Technology=SMT
R24: library part RES, "560K 0.063W 1% 0402 (1005 Metric)  SMD", Case-EIA=0402, Case-Metric=1005, Manufacturer="Vishay Dale", Manufacturer Part Number=CRCW0402560KFKED, Power="0.063 W", Supplier Part Number 1=541-560KLDKR-ND, Tolerance="1 %", Max Thickness="0.6 mm", Supplier 1=Digi-Key, Technology=SMT
R25: library part RES, "10K 0.063W 5% 0402 (1005 Metric)  SMD", Case-EIA=0402, Case-Metric=1005, Manufacturer="Vishay Dale", Manufacturer Part Number=CRCW040210K0JNED, Power="0.063 W", Supplier Part Number 1=541-10KJCT-ND, Tolerance="5 %", Max Thickness="0.6 mm", Supplier 1=Digi-Key, Technology=SMT
R26: library part R0402-12k, "Resistor, ±1%, 0.063W", Case-EIA=0402, Case-Metric=1005, Manufacturer=Panasonic, Manufacturer Part Number=ERJ-2GE0R00X, Supplier Part Number 1=P0.0JTR-ND, Tolerance="5 %", Max Thickness="0.6 mm", Note="0.1W JUMPER", Pin Count=2, Supplier 1=Digi-Key, Technology=SMT
R34: library part RES, "10K 0.063W 1% 0402 (1005 Metric)  SMD", Case-EIA=0402, Case-Metric=1005, Manufacturer=Susumu, Manufacturer Part Number=RR0510P-103-D, Power="0.063 W", Supplier Part Number 1=RR05P10.0KDTR-ND, Tolerance="1 %", Max Thickness="0.6 mm", Supplier 1=Digi-Key, Technology=SMT
RT1: library part MURA-NCP18XH103F03RB-2, "NTC Thermistor, 10 KOhm, +/- 1%, 0.1 W, -40 to 125 degC, 0603 (1608 Metric), RoHS, Tape and Reel", Case-EIA=0603, Case-Metric=1608, Manufacturer=Murata, Rated Current=310A, Resistance=10kO, Supplier Part Number 1=490-4800-2-ND, Temperature Range=-40to+125degC, Tolerance="1 %", Tolerance (%)=±1%, B-constant=3434K, Datasheet URL=http://www.jameco.com/Jameco/Products/ProdDS/1870999.pdf, Datasheet Version=Apr-05, Manufacturer Part Number=NCP18XH103F03RB, Manufacturer URL=http://www.murata.com/, Max Thickness="0.6 mm", Supplier 1=Digi-Key, Technology=SMT, Type=NTC
SW1: library part SW_SKRAALE010, Manufacturer=ALPS, Manufacturer Part Number=SKRAAKE010
T1: library part TRANS-DOT-1-1-4, "Power Inductor and Transformer, 9.6 / 38.42 uH, +/- 20%, 3.4 / 1.7 A, -40 to 85 degC, 4-Pin SMD, RoHS, Tape and Reel", Case-EIA=3.9mmx3.9mm, Inductance - Parallel=3.3uH, Manufacturer=CoilCraft, Maximum DC Current=1.3A, Maximum DC Resistance=19mOhms, Operating Temperature Range=-40Cto+85C, Package Description="4-Pin Surface Mount Device, Body 11.43 x 11.43 mm", Tolerance=20%, Brand=CoilCraft, Core Material=AmorphousMetal, Datasheet URL=https://www.coilcraft.com/pdfs/na5880.pdf, Datasheet Version=03/2007, Height=6.35mm, Inductance - Series=3.3uH, Length=13.97mm, Manufacturer Part Number=NA5880-AE, Manufacturer URL=www.coilcraft.com, Max Thickness=1.1mm, Mounting Style=SMD/SMT, Mounting Technology=SurfaceMount, Packaging=Reel, Product=PowerInductors, Product Category=CoupledInductors, RoHS=True, Series=CTX4,4P,4A, Supplier 1=CoilCraft, Supplier Part Number 1=NA5880-AE, Termination Style=SMD/SMT, Tradename=OCTA-PAC, Type=InductorsandTransformers, Unit Weight=0.112000oz, Width=13.97mm
U5: "IC PIEZO ACTUATOR DVR 24MLP", Case-EIA=24-WFQFN, Manufacturer="ON Semiconductor", Manufacturer Part Number=FAN8841MPX, Supplier 1=Digi-Key, Supplier Part Number 1=FAN8841MPXCT-ND, Technology=SMT
U6: library part LIS2DH, Case-EIA=14-VFLGA, Manufacturer=ST, Supplier Part Number 1=497-13795-2-ND, Manufacturer Part Number=LIS2DHTR, Supplier 1=Digi-Key, Technology=SMT

## Via types
v1: diameter 16, hole 8, Top to Bottom, tented both sides, 123 vias
v2: diameter 20, hole 10, Top to Bottom, tented both sides, 54 vias
v3: diameter 20, hole 10, Top to Bottom, 5 vias
v4: diameter 23.62, hole 11.81, Top to Bottom, tented both sides, 1 vias

## Nets (pads, with @x,y where several pads share a name; then routed paths per layer and width w, separated by ;. In a path a pad name is that pad's centre, name@x,y a point inside that pad or via, vN(x,y) a via of type N, cw(c..) or ccw(c..) an arc to the next point about the centre after c; other vN are vias at no path point)
3V3: C33.1 C34.2 C37.1 C38.1 C39.2 J3.2 L2.2 RT1.2 TP10.1 TP24.1 U6.3 U6.4 U6.7 U6.8 | length 997.3
  Top w7: U6.4@1476.42,1887.34 U6.3@1476.42,1901.12 ; U6.7@1531.54,1866.67 1571.75,1866.67 1592.42,1887.34 U6.8@1559.09,1887.34
  Top w8: U6.4@1476.42,1887.34 1476.42,1863.58 v1(1477,1863)
  Top w10: v2@1159.36,58.58 1165.58,58.58 1174.21,67.21 J3.2@1174.21,116.09
  Top w17: v1(755.88,-12.71) C39.2@791.31,-12.71 785.64,-7.03 785.64,0.83 787,2.19 787,38.75 RT1.2@784.43,41.33 ; 1592.42,1887.34 1656.2,1887.34 C34.2@1658.76,1884.78 ; v1(1658.74,1852.89) C34.2@1658.74,1884.76 ; v1(1691,1882) 1661.54,1882 C34.2@1658.76,1884.78
  Bottom w17: v1(1691,1882) TP24.1@1733,1882
  Bottom w20: 754,44.82 755.88,42.94 v1(755.88,-12.71) ; v2(2632,238) 2662,268 TP10.1@2662,270.91
  Bottom w30: 754,44.82 1011.18,44.82 1040.41,15.59 v2@1159,15.59
  other v1: 1578.29,241 1570.26,276
  other v2: 1157,16 1162,61 2571,264 1729.13,266 2617.38,289 2564,315
+5: C1.1 C2.1 C3.1 C4.1 C5.1 C6.1 C23.1 C25.1 C29.2 J3.1 J5.4 L1.2 R20.2 T1.1 TP9.1 TP11.1 U5.3 U5.14 | length 539.3
  Top w12: v2(1077,80) 1132,80 1154.53,102.53 J3.1@1154.53,116.09 ; v2(1182,2177.32) 1183.53,2178.85 1195.61,2178.85 J5.4@1222.35,2205.59 1222.35,2244.35 v2(1223,2245) ; R20.2@1816,1179.31 1840.34,1179.31 v1(1854,1192.98) ; U5.14@1857.08,1349.49 1895.73,1349.49 v1(1896.22,1349)
  Bottom w12: v1(1448.86,1188) 1448.86,1342.86 TP11.1@1507,1401 ; TP9.1@2450,-29 2450.5,-28.5 2476.14,-28.5 v1(2476.64,-28)
  other v1: 2495.3,44.8 1494,1143 1450,1239 1449.88,1290 1558,1381 1597,1397
  other v2: 2433,-53 2436,-0.75 2450.75,43 1030,81 1451,1343
ACCELERO_INT: J4.14 R1.1 R2.1 | length 2820.5
  Top w7: R2.1@1983,1838 R1.1@1983,1791 v1(2083.75,1791) ; J4.14@2181.81,96.27 v1(2181.81,53.76) v1@2182,53.57
  Bottom w7: v1(2083.75,1791) 2142.85,1791 ; 2142.85,1790.91 2945.75,393.75 2698,146 2466,146 2331,11 2191.64,11 2181.81,20.83 v1(2181.81,53.76)
ADC_CH1: J4.5 R34.2 RT1.1 | length 1378.5
  Top w7: R34.2@831.18,91.64 831.54,92 v2(870.2,92) ; v2(1725,144) 1725,141 1837.39,28.61 1975,28.61 2004.65,58.26 J4.5@2004.65,96.27
  Top w15: R34.2@831.18,91.64 834.38,88.44 834.38,44.52 RT1.1@837.57,41.33
  Bottom w7: v2@868,91.64 885.64,91.64 899,105 1263.4,105 1278.4,90 1432.13,90 1505.13,163 1706,163 v2(1725,144)
CAP1_TOUCH_OUT: J3.7 J4.7 | length 988.7
  Top w7: J3.7@1272.64,116.09 1272.64,155.08 1288,170.45 1316.45,170.45 1349,203 v2(1447,203) ; v2@1586.32,204 v2(1587,204) 1587,202 1789.75,-0.75 2000.25,-0.75 2044.02,43.02 J4.7@2044.02,96.27
  Bottom w7: v2(1447,203) 1447.5,203.5 1586.5,203.5 v2(1587,204)
CAP2_TOUCH_OUT: J3.5 J4.8 | length 1147.9
  Top w7: v2(1233,23.97) 1233.27,24.24 J3.5@1233.27,116.09 ; v1@2059,27.12 2063.7,31.82 J4.8@2063.7,96.27
  Bottom w7: v2@1233.36,24.33 1247.69,10 1320.03,10 1365.56,55.53 1475.53,55.53 1505,85 1505,130 1521,146 1685,146 1825,6 2039.49,6 v1(2062,28.51)
EN: J4.17 R26.2 U5.10 | length 2513.7
  Top w7: v1(1526.54,713) 1530.49,394.49 1484,348 1484,238 1624,98 v1(1624,67) ; v1(1529,905) 1694.22,905 1921,1131.78 v1(1921,1230) ; U5.10@1788.18,1300.28 1788.18,1262.82 v1(1797,1254) ; v1(1923,-61) 2190,-61 2240.87,-10.13 J4.17@2240.87,96.27
  Top w10: R26.2@1914,1259.16 1921,1252.16 v1(1921,1230)
  Bottom w7: v1(1526.54,713) 1529,715.46 v1(1529,905) ; v1(1624,67) 1681.97,67 1809.97,-61 v1(1923,-61) ; v1(1797,1254) 1821,1230 v1(1921,1230)
  other v1: 1921,1143
FO: R20.1 TP12.1 U5.9 | length 303.6
  Top w7: U5.9@1768.5,1300.28 1768.5,1254.62 1802.46,1220.65 R20.1@1818,1220.65 ; R20.1@1816,1218.69 1857.5,1218.69 1876.15,1200.03 1876.15,1175.83 1842.32,1142 v1(1829,1142)
  Bottom w7: TP12.1@1794.51,1126 1801.67,1126 1815.94,1140.28 1827.28,1140.28 v1(1829,1142)
GND: C1.2 C2.2 C3.2 C4.2 C5.2 C6.2 C23.2 C25.2 C29.1 C30.2 C31.1 C32.1 C33.2 C34.1 C37.2 C38.2 C39.1 J1.2 J2.2 J3.11 J3.12 J4.1 J4.2 J5.3 R22.1 R25.1 R34.1 SW1.2 TP3.1 U5.1 U5.2 U5.4 U5.15 U5.18 U5.25 U6.9 U6.10 U6.11 U6.12 U6.13 U6.14 | length 1949.4
  Top w8: U6.14@1503.98,1949.35 1503.98,1964.98 v1@1517.76,1978.76 ; U6.13@1517.76,1949.35 v1@1517.76,1978.76 ; U6.12@1531.54,1949.35 1531.54,1964.98 v1@1517.76,1978.76
  Top w10: v1(758,91) 791.17,91 R34.1@791.81,91.64 ; C39.1@830.68,-12.71 832,-14.02 v1(832,-46) ; v2(1215.7,2159.47) J5.3@1239.39,2195.74 v2(1256,2223) ; v2(1336,1178) 1338.71,1178 1342,1181.29 1363.29,1181.29 C2.2@1368,1186 ; v2(1336,1222.32) 1337.84,1224.16 1366.15,1224.16 C3.2@1367.99,1226 ; v2(1336,1265.06) 1336.47,1265.53 1367.53,1265.53 C4.2@1368,1266 ; v2(1336,1305) 1336.5,1305.5 1367.5,1305.5 C5.2@1368,1306 ; v2(1337,1347.28) 1337.64,1346.64 1367.35,1346.64 C6.2@1367.99,1346 ; v2(1339,61) 1339,61.15 1351.38,73.53 J3.11@1351.38,116.09 ; v2(1351,165) 1351.19,164.81 1351.19,116.28 J3.11@1351.38,116.09 ; v2(1402,165.01) 1399.29,165.01 1384.96,150.68 1384,150.68 1371.06,137.74 J3.12@1371.06,116.09 ; v2(1404,115) 1371.97,115 1371.06,115.91 J3.12@1371.06,116.09 ; v1(1550,1202) 1574.54,1202 C31.1@1584.07,1192.46 ; U6.9@1557.19,1904 1557.19,1928.68 1559.09,1930.09 v1(1577,1948) ; v1(1667,1429) 1698.83,1429 U5.1@1699.6,1428.23 1729.13,1428.23 v3(1738.97,1418.39) v3(1778.34,1379.02) ; U5.4@1699.6,1369.17 1768.5,1369.17 v3(1778.34,1379.02) ; U5.2@1699.6,1408.54 U5.25@1738.97,1408.54 ; U5.15@1857.08,1369.17 1788.18,1369.17 v3(1778.34,1379.02) ; v1(1888,1436) 1880.23,1428.23 U5.18@1857.08,1428.23 1827.55,1428.23 v3(1817.71,1418.39) v3(1778.34,1379.02) ; J3.11@1351.38,116.09 J3.12@1371.06,116.09
  Top w12: v1(1458.22,1408.54) 1486.32,1408.54 C29.1@1492.31,1402.55 ; v1(1552,1248) 1553.12,1249.12 R25.1@1583.42,1249.12 ; v1(1609,1956) 1609,1927.91 C33.2@1612.76,1924.15 ; v1(1643.28,1958) 1643.28,1940.12 1659,1924.39 C34.1@1658.76,1924.15 ; C30.2@1712.74,1180.98 1753.26,1180.98 R22.1@1753.46,1180.78 1773.43,1180.78 1782,1189.35 v1(1783,1189.35)
  Top w15: v1(893.72,1425) J1.2@892.72,1462.6 915.4,1462.6 v1(928,1450) ; v1(1571,323) 1613.5,323 C38.2@1615.72,320.78 v1(1615.72,358) ; v1(1618.76,800.2) SW1.2@1657.72,800.2 ; v1(1619.15,1024) SW1.2@1657.72,1022.64 ; v1(1669,338) 1669,304.69 1669.69,304 v1(1705,304) ; v1(1888,1436) 1894,1442 v1(1920,1442) ; v1(2310,1425) 2310,1461.57 J2.2@2311.02,1462.6 ; v2@2571,53.09 v2(2571,54.45)
  Top w18: C25.2@2539,2.66 2546,9.66 2546,33 2566.09,53.09 v2@2571,53.09
  Top w25: C25.2@2539,2.66 2542.5,-0.84 2542.5,-50.81 C23.2@2542.69,-51
  Bottom w15: TP3.1@1843,1882.81 1865.81,1860 v2(1868,1860)
  other v1: 1977,1200.46 2027,1202 2086,1203.46 1953,1239 2004,1238.66 2051,1238.66 2087,1266 2088,1309 1932.73,1337 2348.9,1357 2308,1358 2334,1392 930,1393.46 999,1395 965,1425 1395,1435 1444.35,1435 999,1449 1518,1979
  other v2: 1763,-53.34 1709.82,-51 1663,-25 1703.54,5.74 1658.46,40.82 2597,83 1878.22,86 1865,121 1814,142 1909.17,147 1859,170 1401.24,225 1446,270 1514,270 1255,1168.28
  other v3: 1738.97,1339.65 1817.71,1339.65
"LED Str CLK": J4.10 J5.2 | length 3989.5
  Top w7: J5.2@1256.44,2185.9 1256.44,2181.44 1240,2165 1240,2076.95 1271.95,2045 1644.28,2045 1751.28,1938 v1(2110.61,1938) ; v1@2103.07,48.81 J4.10@2103.07,96.27
  Bottom w7: v1(2103,48.81) 2103,21.89 2116.95,7.94 2152.75,7.94 2178.7,-18 2353,-18 2481.41,110.41 2724.41,110.41 3001.5,387.5 v1@2110.51,1937.94
"LED Str DATA": J4.11 J5.1 | length 3838.4
  Top w7: J5.1@1273.49,2176.06 1270.26,2172.83 1270.26,2088.74 1297,2062 1653,2062 1755.72,1959.28 v1@2070.36,1959.28 ; J4.11@2122.76,96.27 2122.76,40.93 2133,30.68 v1(2133,28.25)
  Bottom w7: v1(2070.23,1959.2) 2972,390 2707,125 2470,125 2343,-2 2183,-2 2152.75,28.25 v1(2133,28.25)
NetC30_1: C30.1 R21.1 TP13.1 U5.7 | length 166.1
  Top w10: C30.1@1714.74,1226.35 v1(1714.74,1260) 1714.74,1278.74 1729.13,1293.13 U5.7@1729.13,1300.28
  Top w15: R21.1@1671.25,1220.35 C30.1@1712.74,1220.35
  Bottom w10: TP13.1@1679.37,1237.31 1692.04,1237.31 v1(1714.74,1260)
NetC31_2: C31.2 R21.2 | length 53.3
  Top w15: C31.2@1623.95,1192.98 C31.2@1623.44,1192.46 1634.93,1180.98 R21.2@1671.25,1180.98
NetC32_2: C32.2 D3.2 R24.2 TP16.1 U5.16 U5.17 | length 652.7
  Top w20: v2(1556.09,1292.89) 1582.57,1292.89 1582.99,1292.46 R24.2@1583.42,1292.89
  Bottom w10: TP16.1@2022,1627 2023,1626 v1(2023,1594)
  Bottom w20: v2(1556.09,1292.89) 1595.89,1292.89 1639,1336 1686.44,1336 1722.44,1300 1957.35,1300 1992,1334.65 v1(1992,1443.24)